# Altium PCB 06002480宁波2号线二期车载PIS系统_功率放大器音频板2 BHC-A-2030-05_PCB V1.0.PcbDoc (part 6 of 6)
Units mil, origin at the board's own origin, x right, y up, seen from the top; angles counter-clockwise.
Board outline 3385.83 x 3779.53 mil, 4 copper layers (Top Layer, GND, VDD, Bottom Layer); 210 components, 185 nets, 792 pads, 313 vias.
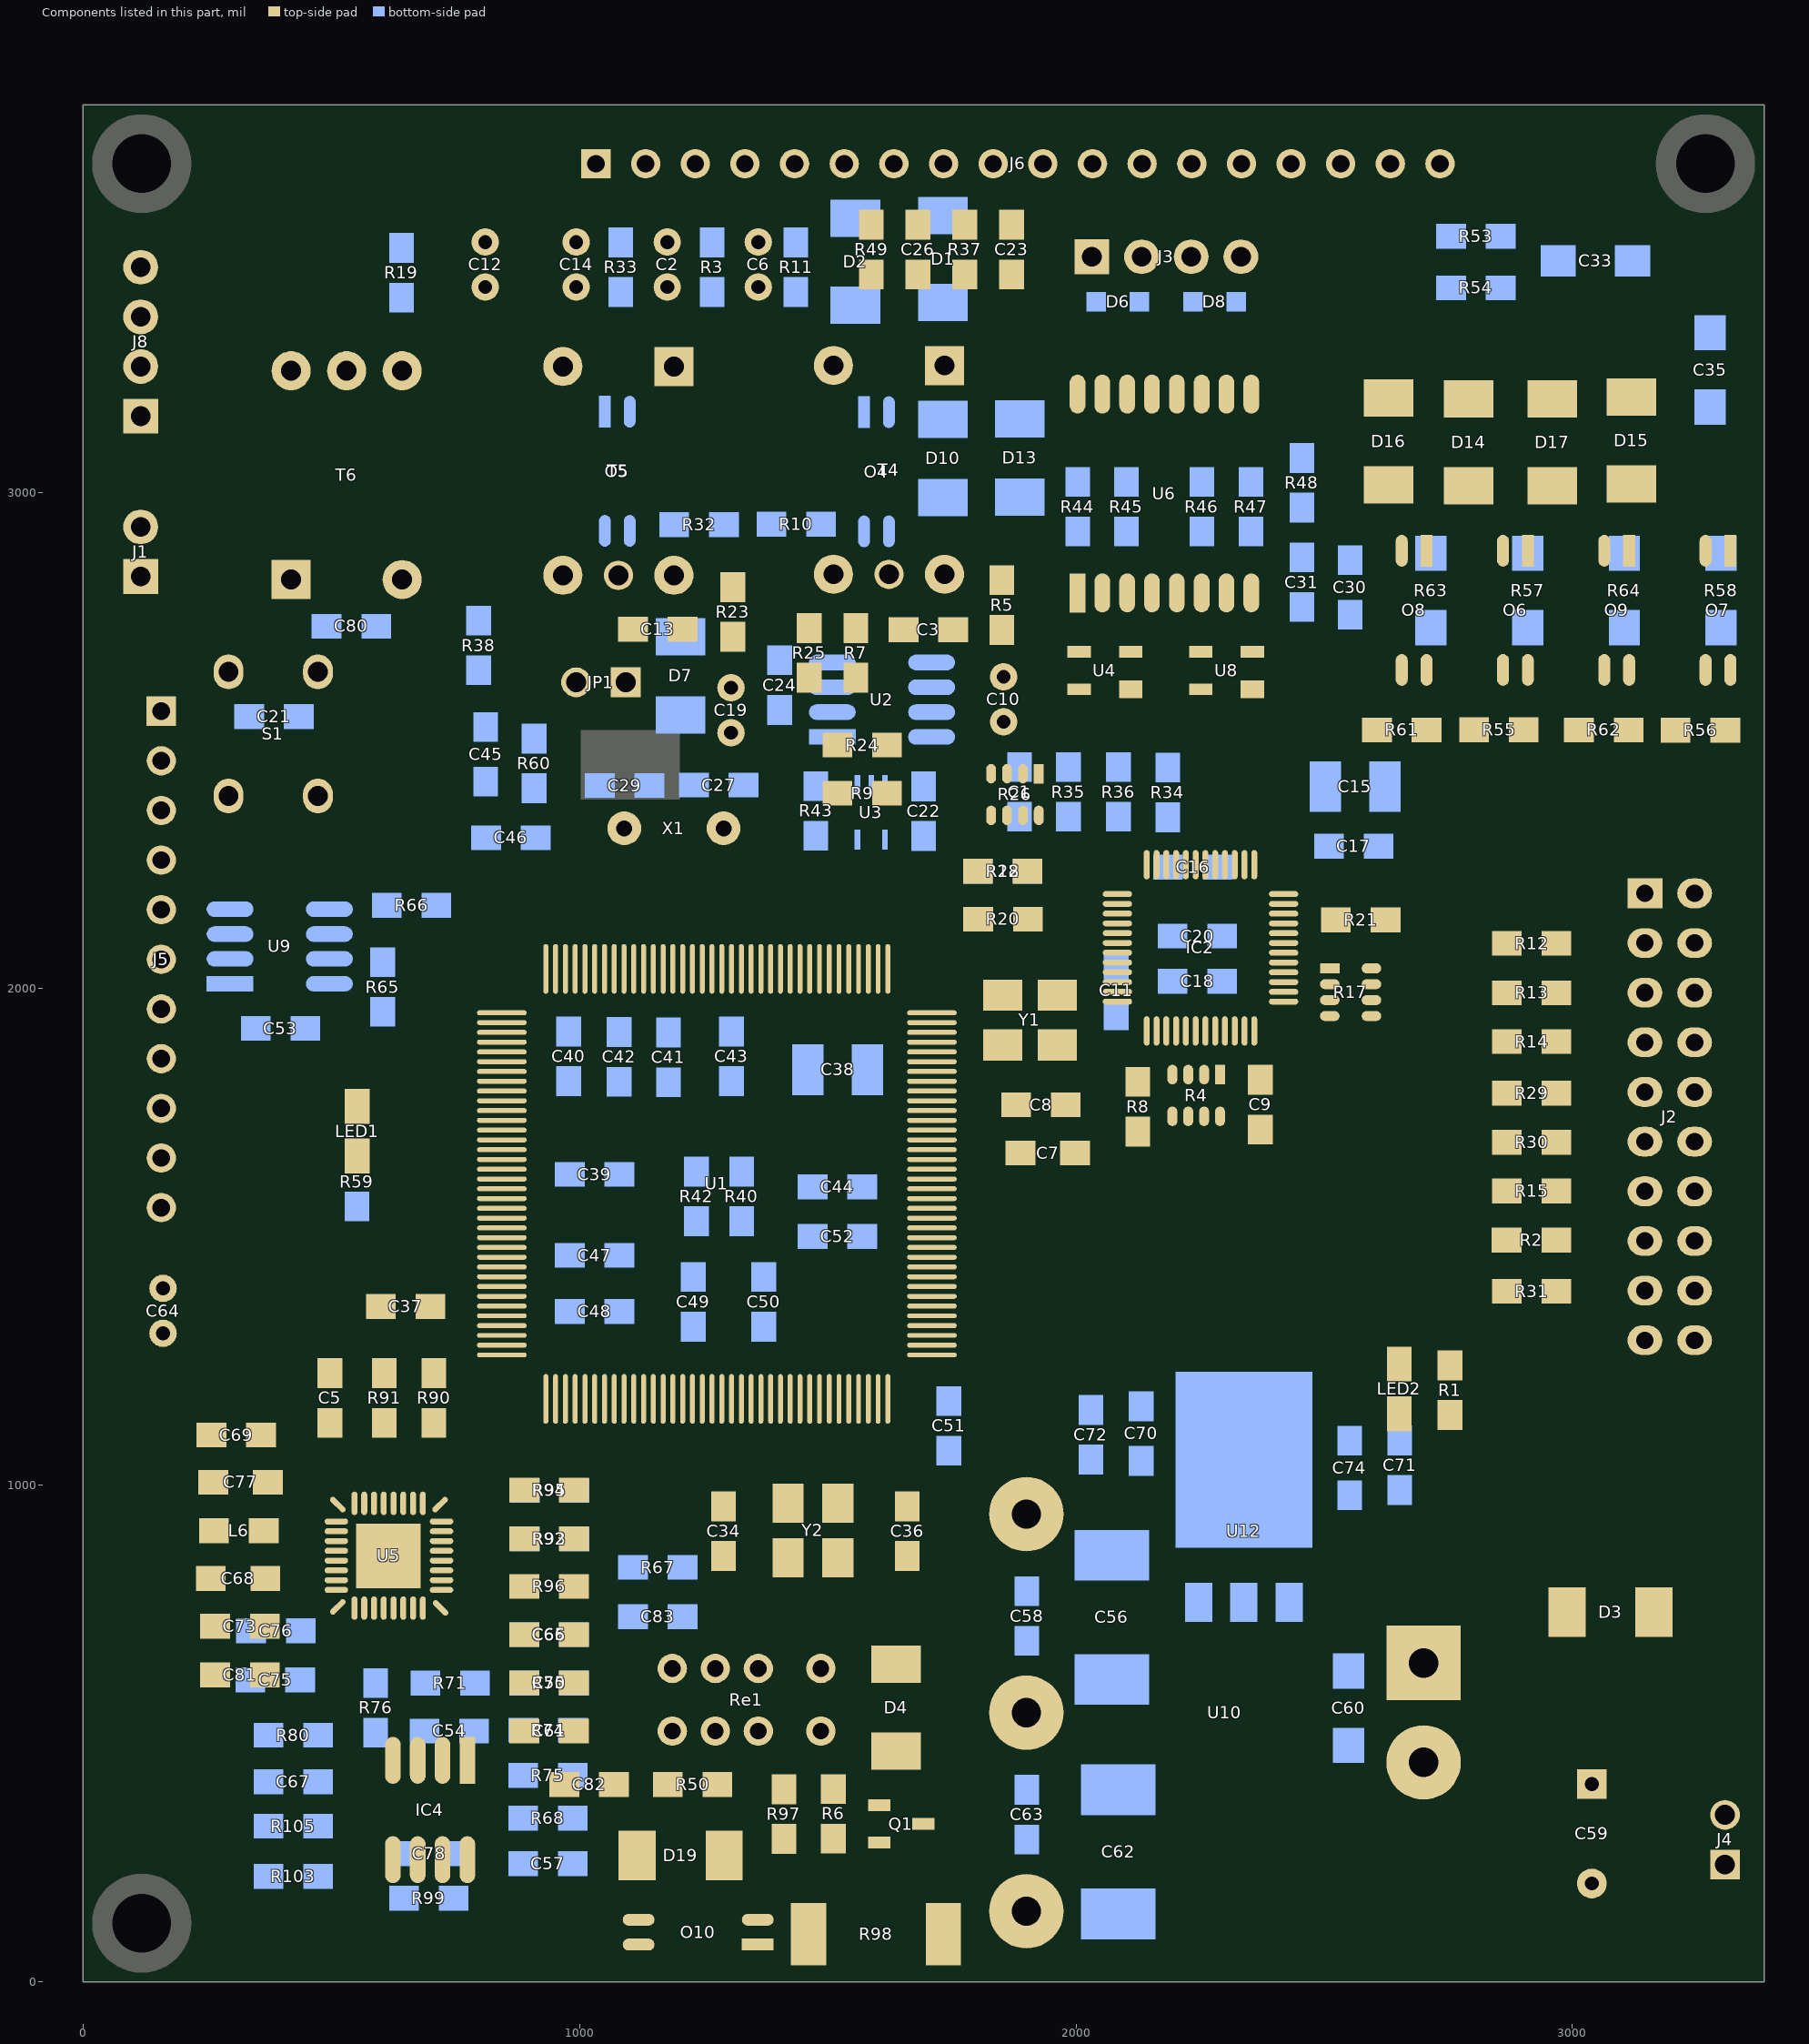
[diagram p8: the components of this part, seen from the top]

## Other copper
GND (plane layer: these items are gaps in the copper):
  circle w60: c118.11,118.11 r79.33
  circle w60: c118.11,3661.42 r79.33
  rectangle: 2340,341 2391,421
  rectangle: 2376,290 2419,476
  rectangle: 2419,338 2494,520
  rectangle: 2271,17 2512,372
  rectangle: 2484,8 2569,756
  rectangle: 2536,6 2637,810
  rectangle: 2594,4 2670,864
  rectangle: 2644,12 3369,887
  rectangle: 48,51 194,187
  rectangle: 6,8 93,88
  region: 8,3773.53 8,3686.53 88,3686.53 88,3773.53
  region: 51,3731.53 51,3585.53 187,3585.53 187,3731.53
  lines w30: -5,3566.53 107,3566.53 131,3590.53 ; -2,3521.53 111,3634.53 111,3678.53 207,3774.53 182,3774.53 146,3738.53 213,3738.53 253,3778.53 234,3778.53 176,3720.53 176,3727.53 227,3778.53 271,3778.53 213,3720.53 213,3652.53 ; 2,3576.53 5,3579.53 96,3579.53 ; 26,3576.53 26,3657.53 31,3662.53 ; 117,31 122,26 203,26 ; 127,213 59,213 1,271 1,227 52,176 59,176 1,234 1,253 41,213 41,146 5,182 5,207 101,111 145,111 258,-2 ; 189,131 213,107 213,-5 ; 200,96 200,5 203,2 ; 1987,3318 1987,3778 ; 1987,3329 1987,3014 1995,3006 2434,3006 2619,3006 2621,3004 ; 2618,3007 2621,3004 ; 3380,2695 3370,2685 2621,2685 2621,3004
  lines w60: 2223,11 2293,81 2293,364 2481,552 2481,736 2654,909 3374,909
  lines w80: 3054,3749 3054,3439 3168,3325 3221,3325 3356,3325
VDD (plane layer: these items are gaps in the copper):
  circle w20: c118.11,118.11 r98.11
  circle w20: c118.11,118.11 r83.28
  circle w20: c118.11,3661.42 r83.28
  circle w20: c118.11,3661.42 r98.11
  rectangle: 2591,7 3366,880
  rectangle: 2333,0 2593,368
  rectangle: 2357,349 2619,404
  rectangle: 2395,395 2615,437
  rectangle: 2428,428 2616,468
  rectangle: 2458,464 2613,508
  rectangle: 2493,504 2621,545
  rectangle: 2533,522 2614,810
  rectangle: 2546,788 2636,840
  rectangle: 41.61,41.61 194.61,194.61
  region: 41.61,3737.92 41.61,3584.91 194.61,3584.91 194.61,3737.92
  lines w25: 2621,2651 2621,3133
  lines w30: 3,3566.53 5,3568.53 ; 6,237 63,180 65,180 ; 6,3612.53 51,3612.53 67,3596.53 39,3568.53 5,3568.53 ; 6,3721.53 6,3728.53 44,3766.53 ; 10,217 46,181 46,150 ; 10,3575.53 25,3575.53 ; 11,3533.53 46,3568.53 65,3568.53 ; 12,67 64,15 107,15 ; 13,44 51,6 58,6 ; 14,257 59,212 123,212 ; 15,3672.53 15,3715.53 67,3767.53 ; 21,196 23,194 23,126 ; 57,3607.53 44,3607.53 5,3568.53 ; 103,3568.53 5,3568.53 ; 126,3756.53 194,3756.53 196,3758.53 ; 150,3733.53 181,3733.53 217,3769.53 ; 167,6 167,51 183,67 211,39 211,5 ; 172,57 172,44 211,5 ; 180,3714.53 180,3716.53 237,3773.53 ; 204,10 204,25 ; 211,65 211,46 246,11 ; 211,103 211,5 ; 212,3656.53 212,3720.53 257,3765.53 ; 213,3 211,5 ; 1014,3348 1020,3348 ; 1798,9 1800,7 ; 1887,3308 1890,3311 ; 1948,3314 1948,3077 1971,3054 2385,3054 2393,3062 2393,3295 ; 2236,-5 2265,-5 2347,77 ; 2284,329 2297,329 2333,293 ; 2289,329 2355,395 2360,395 ; 3374,2567 3381,2574
  lines w40: 376,3769 376,3515 543,3348 1014,3348 ; 1020,3348 1061,3307 2561,3307 2621,3247 2621,3094 2621,2653 2707,2567 3374,2567 ; 2330,6 2333,9 2333,368 2525,560 2525,802 2608,885 3375,885
  lines w80: 3054,3757 3056,3755 3056,3437 3170,3323 3359,3323

## Silkscreen, mask and mechanical layers (free items; w line width, h text height)
Top Overlay:
  circle w10: c1704,2025 r24.35
  circle w5: c889,139 r34.83
  circle w5: c1901,1122 r36.62
  circle w5: c2916,1091 r33.3
  circle w5: c2916,1219 r32.2
  lines w5: 910,449 1326,449 1337,438 1337,355 1321,339 1056,339 1049,332 1049,300 1039,290 869,290 869,426 892,449 917,449
  lines w6: 2996,3429 3062,3495 3182,3495 3116,3429 ; 3055,3429 3121,3495 3121,3604 3178.42,3661.42 3267.72,3661.42
  lines w10: 112.43,3839 112.43,3859 ; 172.43,3829 112.43,3849 ; 172.43,3869 112.43,3849 ; 214.02,3849 112.43,3849 ; 925.8,3849 1027.39,3849 ; 967.39,3829 1027.39,3849 ; 967.39,3869 1027.39,3849 ; 1027.39,3839 1027.39,3859
  text "914.961 (mil)" at 224.02,3813.01 h30
  text "BHC-A-2030-05 V1.0" at 383,3669 h60
  text "GND" at 2881,1150 h50
  text "+5V" at 1858,1053 h50
  text "+3.3V" at 2852,1021 h50
  text "110V" at 3268,383 h50
  text "110-GND" at 3228,140 h50
  text "-5V" at 845,58 h50
  text "四层板，全工艺，板厚1.6mm" at 822,-118 h50